# Altium PCB Test Board TFT.PcbDoc
Units mm, origin at the board's own origin, x right, y up, seen from the top; angles counter-clockwise.
Board outline 146.15 x 87.23 mm, 2 copper layers (Top Layer, Bottom Layer); 5 components, 44 nets, 132 pads, 0 vias.
Unrouted connection lines stored in the file: 43.
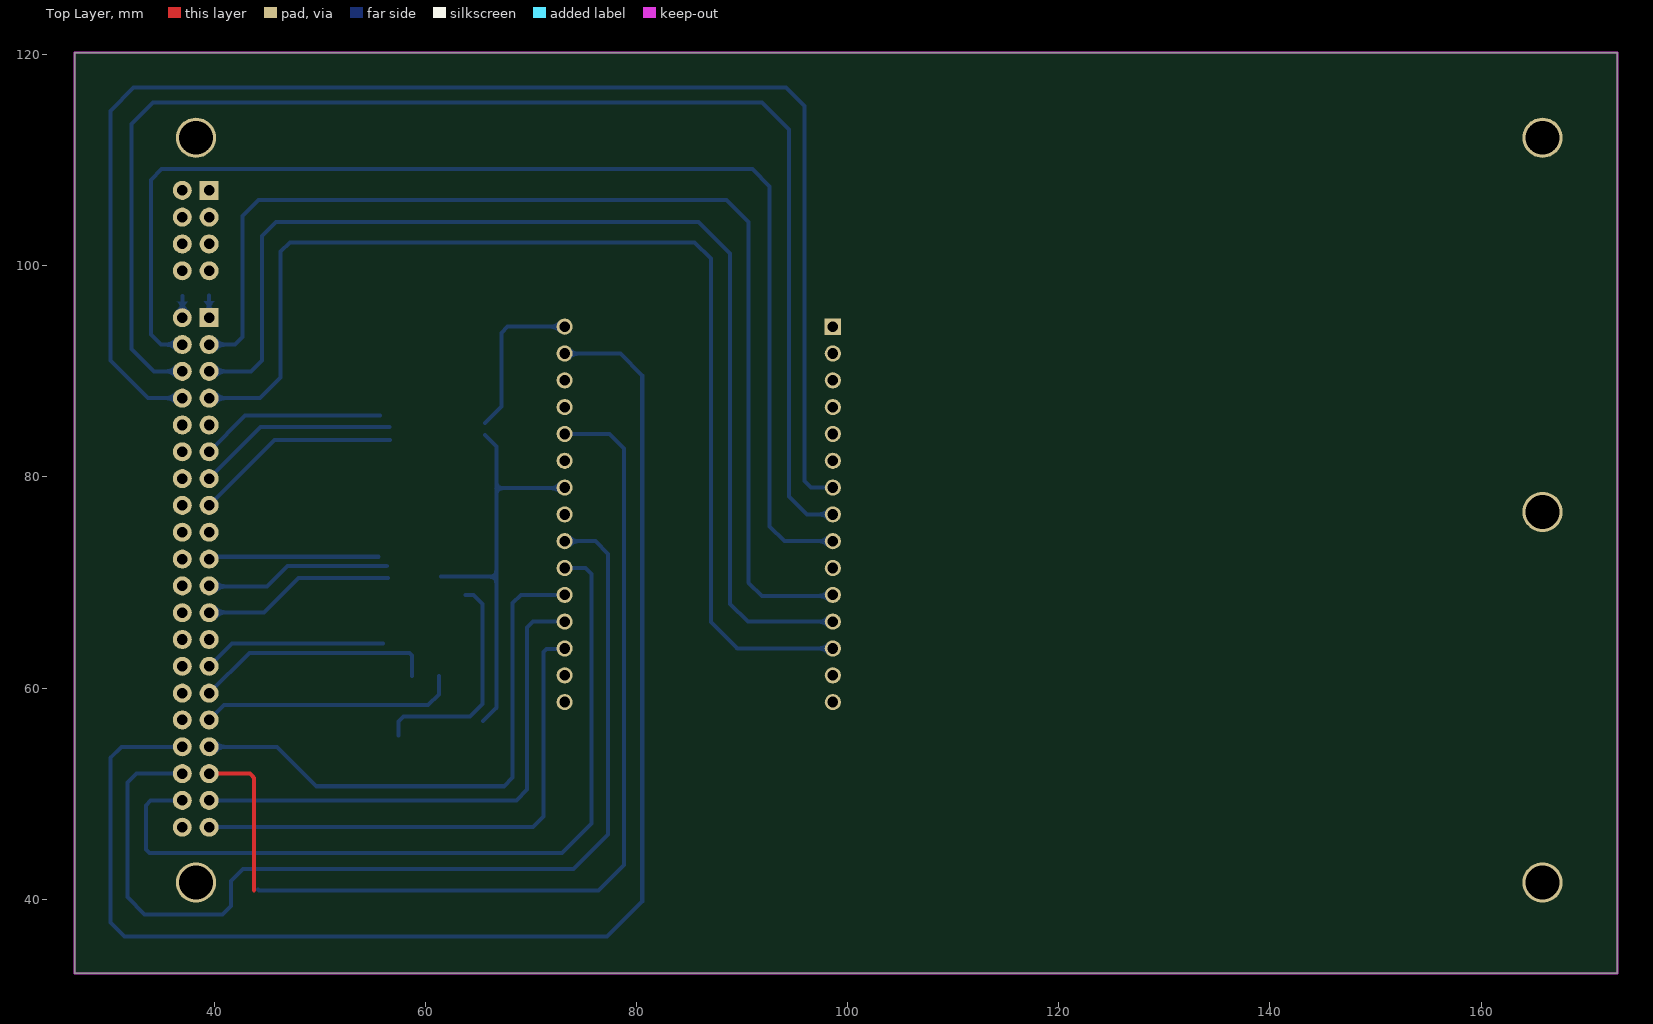
[diagram p0: Top Layer view]
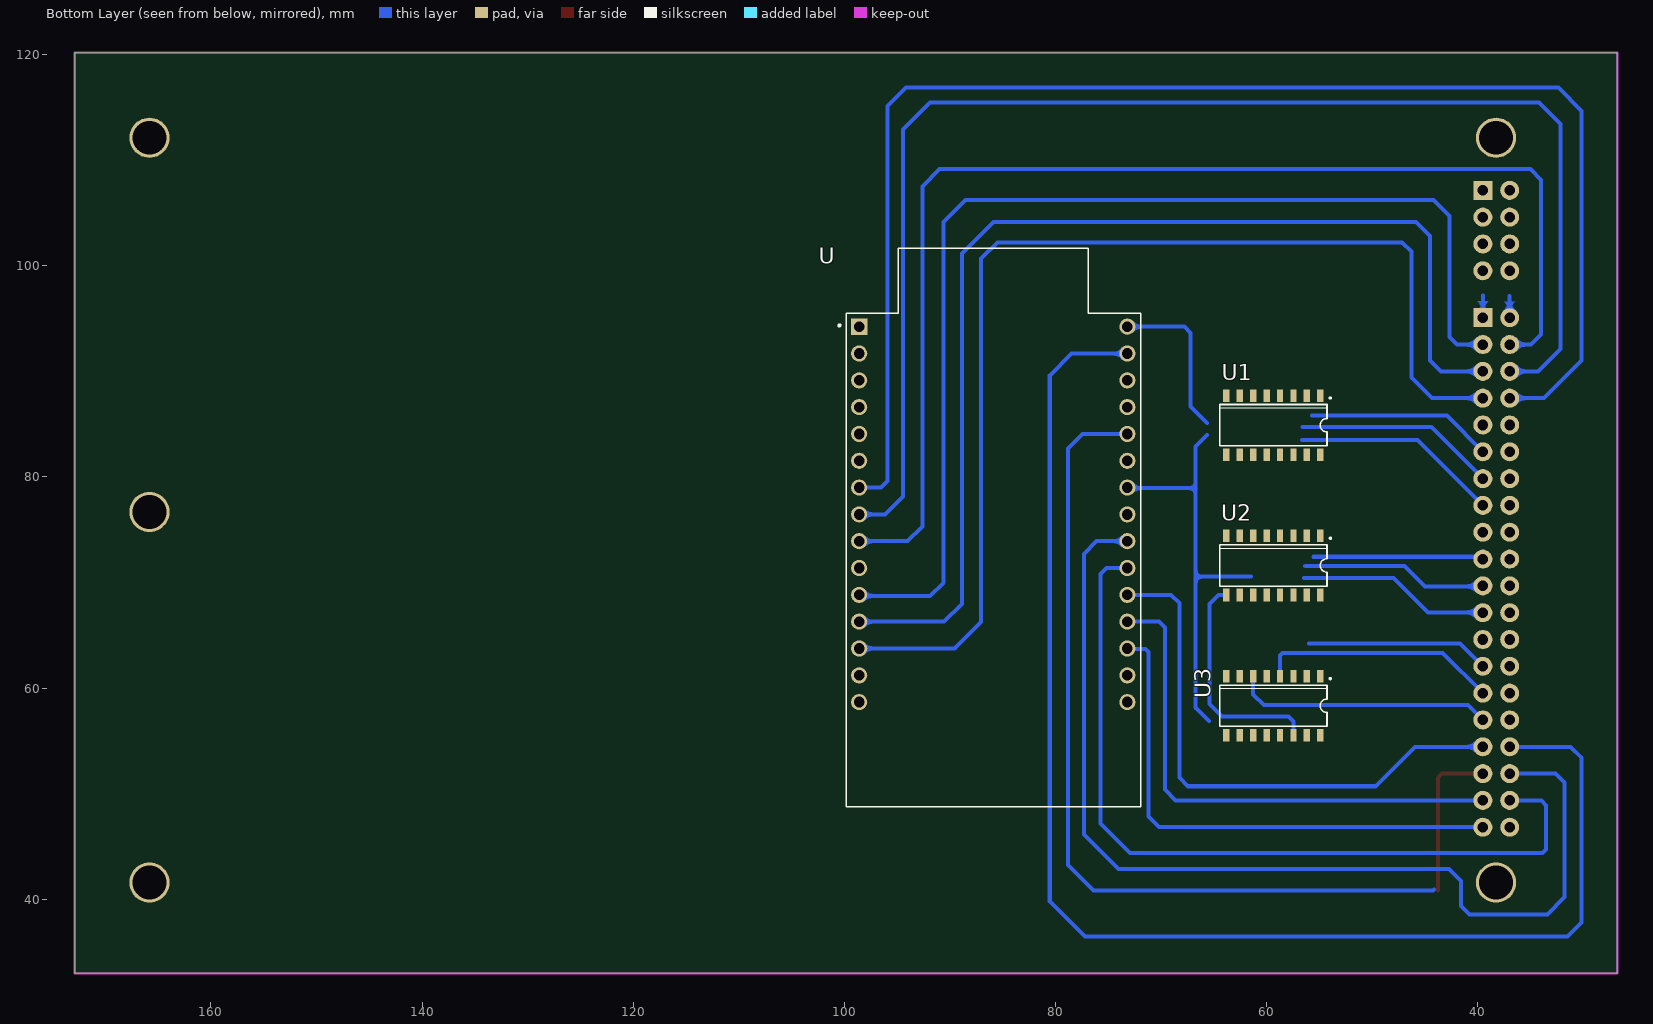
[diagram p1: Bottom Layer view, seen from below]

## Layer stack, top to bottom
Top Solder: solder mask 0.0102, Solder Resist, Dk 3.5
Top Layer: signal copper 0.0356
Dielectric 1: dielectric 0.32, FR-4, Dk 4.8
Bottom Layer: signal copper 0.0356
Bottom Solder: solder mask 0.0102, Solder Resist, Dk 3.5

## Board outline
26.775,32.975 26.775,120.2 168.375,120.2 172.925,120.2 172.925,32.975

## Design rules (kind name [scope] priority, off if disabled: settings)
Clearance [All] p1: gap=0.508 ignorepadtopadclearanceinfootprint=FALSE
PlaneConnect [All] p1: planeconnectstyle=Direct reliefexpansion=0.508 reliefentries=4 reliefconductorwidth=0.254 reliefairgap=0.254
PolygonConnect [All] p1: connectstyle=Direct reliefconductorwidth=0.254 reliefentries=4 polygonreliefangle="90 Angle" airgapwidth=0.254
RoutingVias [All] p1: holewidth=1.2 width=1.8 viastyle="Through Hole" minholewidth=1.2 minwidth=1.8 maxholewidth=1.2 maxwidth=1.8
SolderMaskExpansion [All] p1: expansion=0.102 istentingtop=FALSE
Width [All] p1: maxlimit=0.762 minlimit=0.381 preferedwidth=0.508
29 further rules are at their usual default settings.

## Components (designator, comment, footprint, x,y, rotation, side; value= is the part's Value field where it differs from the comment)
U "ESP32-DEVKITC" MODULE_ESP32-DEVKITC 85.9,71.38 r180 bottom
U1 "LOGIC-74HC595N(DIP16)" SO16 59.375,84.9 r0 bottom
U2 "LOGIC-74HC595N(DIP16)" SO16 59.375,71.612 r0 bottom
U3 "LOGIC-74HC595N(DIP16)" SO16 59.375,58.325 r0 bottom
? "TFT" "Female Header 20x2" 39.525,95.08 r180 top

## Footprints (in the part's own frame and the unit in brackets; to place one, negate y for a bottom-side part, rotate by r counter-clockwise, add the part's x,y. Pads: shape width x height; smd on the part's side, far side on the other; paste and mask are expansions set on the pad)
"Female Header 20x2" [mm]
  rect 1.8x1.8 hole 1: 1(0,0) 1-1(0,-12.065)
  round 1.8 hole 1: 1-2(2.54,-12.065) 1-3(0,-9.525) 1-4(2.54,-9.525) 1-5(0,-6.985) 1-6(2.54,-6.985) 1-7(0,-4.445) 1-8(2.54,-4.445) 2(2.54,0) 2(2.54,0) 3(0,2.54) 4(2.54,2.54) 5(0,5.08) 6(2.54,5.08) 7(0,7.62) 8(2.54,7.62) 9(0,10.16) 10(2.54,10.16) 11(0,12.7) 12(2.54,12.7) 13(0,15.24) 14(2.54,15.24) 15(0,17.78) 16(2.54,17.78) 17(0,20.32) 18(2.54,20.32) 19(0,22.86) 20(2.54,22.86) 21(0,25.4) 22(2.54,25.4) 23(0,27.94) 24(2.54,27.94) 25(0,30.48) 26(2.54,30.48) 27(0,33.02) 28(2.54,33.02) 29(0,35.56) 30(2.54,35.56) 31(0,38.1) 32(2.54,38.1) 33(0,40.64) 34(2.54,40.64) 35(0,43.18) 36(2.54,43.18) 37(0,45.72) 38(2.54,45.72) 39(0,48.26) 40(2.54,48.26)
  round 3.8 hole 3.2: ""(-126.3,-17.05) ""(-126.3,18.4) ""(-126.3,53.5) ""(1.25,53.5) ""(1.25,-17.05)
  body extent -128.89,-19.67 3.81,56.13, height 15.26
MODULE_ESP32-DEVKITC [mm]
  rect 1.53x1.53 hole 1.02: 1(-12.7,22.85)
  round 1.53 hole 1.02: 2(-12.7,20.31) 3(-12.7,17.77) 4(-12.7,15.23) 5(-12.7,12.69) 6(-12.7,10.15) 7(-12.7,7.61) 8(-12.7,5.07) 9(-12.7,2.53) 10(-12.7,-0.01) 11(-12.7,-2.55) 12(-12.7,-5.09) 13(-12.7,-7.63) 14(-12.7,-10.17) 15(-12.7,-12.71) 16(12.7,-12.71) 17(12.7,-10.17) 18(12.7,-7.63) 19(12.7,-5.09) 20(12.7,-2.55) 21(12.7,-0.01) 22(12.7,2.53) 23(12.7,5.07) 24(12.7,7.61) 25(12.7,10.15) 26(12.7,12.69) 27(12.7,15.23) 28(12.7,17.77) 29(12.7,20.31) 30(12.7,22.85)
  silkscreen extent -14.67,-22.61 13.95,30.3, body extent -14.22,-22.61 14.28,28.32, height 13.03
SO16 [mm]
  rect 0.6x1.2 smd: 1(-4.445,-2.8) 2(-3.175,-2.8) 3(-1.905,-2.8) 4(-0.635,-2.8) 5(0.635,-2.8) 6(1.905,-2.8) 7(3.175,-2.8) 8(4.445,-2.8) 9(4.445,2.8) 10(3.175,2.8) 11(1.905,2.8) 12(0.635,2.8) 13(-0.635,2.8) 14(-1.905,2.8) 15(-3.175,2.8) 16(-4.445,2.8)
  silkscreen extent -5.44,-2.61 5.08,1.96, body extent -4.95,-2.92 4.95,3.08, height 1.75

## Part data
U: "- Transceiver; 802.11 b/g/n _Wi-Fi, WiFi, WLAN_, BluetoothÂ® Smart Ready 4.x Dual Mode For Use With ESP-WROOM-32", Package=None, Availability=Unavailable, MF="Espressif Systems", MP=ESP32-DEVKITC-32D-F, Price=None, SnapEDA_Link=https://www.snapeda.com/parts/ESP32-DEVKITC-32D-F/Espressif%20Systems/view-part/4220172/?ref=snap
U1 U2 U3: "Shift Shift Register 1 Element 8 Bit 16-PDIP", Package="SOT38-4-16 Nexperia", Availability="In Stock", Check_prices=https://www.snapeda.com/parts/74HC595N/Texas+Instruments/view-part/?ref=eda, MF="Texas Instruments", MP=74HC595N, Price=None, Purchase-URL=https://pricing.snapeda.com/search/part/74HC595N/?ref=eda, SnapEDA_Link=https://www.snapeda.com/parts/74HC595N/Texas+Instruments/view-part/?ref=snap

## Nets (pads, with @x,y where several pads share a name; then routed paths per layer and width w, separated by ;. In a path a pad name is that pad's centre, name@x,y a point inside that pad or via, vN(x,y) a via of type N, cw(c..) or ccw(c..) an arc to the next point about the centre after c; other vN are vias at no path point)
+5: ?.2 U1.10 U1.16 U2.10 U2.16 U3.10 U3.16 U.15 | length 2.1
  Bottom Layer w0.381: ?.2@36.985,95.08 36.993,95.088 36.993,97.143 37,97.15
GND: ?.1 ?.40 U1.8 U1.13 U2.8 U2.13 U3.8 U3.13 U.14 | length 2.1
  Bottom Layer w0.381: ?.40@36.963,46.798 ?.40 ; ?.1 39.525,97.175
LATCH: U1.12 U2.12 U3.12 U.25
LCD_BL: ?.39 U.18 | length 49.8
  Bottom Layer w0.381: ?.39 70.195,46.82 71.2,47.825 71.2,63.425 71.498,63.723 73.173,63.723 U.18
LCD_BUSY: ?.37 U.19 | length 49.7
  Bottom Layer w0.381: ?.37 68.635,49.36 69.65,50.375 69.65,65.725 70.215,66.29 U.19
LCD_CLK/SCL: ?.34 U.29 | length 133.2
  Bottom Layer w0.381: ?.34 31.24,54.44 30.2,53.4 30.2,37.775 31.525,36.45 77.225,36.45 80.55,39.775 80.55,89.625 78.5,91.675 73.215,91.675 U.29
LCD_CS: ?.3 U.11 | length 107.1
  Bottom Layer w0.381: ?.3 41.99,92.54 42.7,93.25 42.7,104.725 44.225,106.25 88.525,106.25 90.625,104.15 90.625,69.975 91.875,68.725 98.495,68.725 U.11
LCD_DC: ?.4 U.9 | length 116.5
  Bottom Layer w0.381: ?.4 34.96,92.54 34,93.5 34,108.125 35.025,109.15 90.977,109.15 92.6,107.527 92.6,75.325 94.015,73.91 U.9
LCD_DIN/SDA: ?.35 U.26 | length 96.4
  Top Layer w0.381: ?.35 43.377,51.9 43.675,51.602 43.675,51.575 43.775,51.475 43.775,40.85
  Bottom Layer w0.381: 44.15,40.925 44.25,40.825 76.425,40.825 78.825,43.225 78.825,82.675 77.43,84.07 U.26
LCD_DOUT: ?.36 U.22 | length 98.4
  Bottom Layer w0.381: ?.36 32.625,51.9 31.775,51.05 31.775,40.2 33.425,38.55 40.775,38.55 41.6,39.375 41.6,41.725 42.725,42.85 74.05,42.85 77.325,46.125 77.325,72.7 76.115,73.91 U.22
LCD_PEN: ?.38 U.21 | length 77.7
  Bottom Layer w0.381: ?.38 33.99,49.36 33.525,48.895 33.525,44.725 33.875,44.375 72.94,44.375 75.725,47.16 75.725,70.825 75.18,71.37 U.21
LCD_RD: ?.5 U.12 | length 107
  Bottom Layer w0.381: ?.5 43.5,90 44.525,91.025 44.525,102.8 45.875,104.15 85.9,104.15 88.875,101.175 88.875,67.975 90.56,66.29 U.12
LCD_RESET: ?.7 U.13 | length 108.3
  Bottom Layer w0.381: ?.7 44.36,87.46 46.3,89.4 46.3,101.35 47.175,102.225 85.5,102.225 87.05,100.675 87.05,66.25 89.55,63.75 U.13
LCD_RPTCS: ?.33 U.20 | length 52.4
  Bottom Layer w0.381: ?.33 45.935,54.44 49.675,50.7 67.45,50.7 68.275,51.525 68.275,68.05 69.055,68.83 U.20
LCD_TE: ?.8 U.7 | length 137.8
  Bottom Layer w0.381: ?.8 33.735,87.46 30.175,91.02 30.175,114.675 32.375,116.875 94.15,116.875 95.9,115.125 95.9,79.63 96.54,78.99 U.7
LCD_WR: ?.6 U.8 | length 130.8
  Bottom Layer w0.381: ?.6 34.3,90 32.175,92.125 32.175,113.425 34.225,115.475 91.9,115.475 94.45,112.925 94.45,78.15 96.15,76.45 U.8
Net_9: ?.9 U1.15
Net_10: ?.10 U1.1
Net_11: ?.11 U1.2 | length 17.6
  Bottom Layer w0.381: ?.11 42.945,85.8 55.725,85.8
Net_12: ?.12 U1.3
Net_13: ?.13 U1.4 | length 19.1
  Bottom Layer w0.381: ?.13 44.41,84.725 56.625,84.725
Net_14: ?.14 U1.5
Net_15: ?.15 U1.6 | length 19.7
  Bottom Layer w0.381: ?.15 45.725,83.5 56.675,83.5
Net_16: ?.16 U1.7
Net_17: ?.17 U2.15
Net_18: ?.18 U2.1
Net_19: ?.19 U2.2 | length 16.7
  Bottom Layer w0.381: ?.19@38.92,72.4 38.959,72.439 55.589,72.439
Net_20: ?.20 U2.3
Net_21: ?.21 U2.4 | length 18
  Bottom Layer w0.381: ?.21@39.184,69.625 45.025,69.625 46.95,71.55 56.35,71.55
Net_22: ?.22 U2.5
Net_23: ?.23 U2.6 | length 18.3
  Bottom Layer w0.381: ?.23@39.492,67.175 44.725,67.175 47.975,70.425 56.475,70.425
Net_24: ?.24 U2.7
Net_25: ?.25 U3.15
Net_26: ?.26 U3.1
Net_27: ?.27 U3.2 | length 17.3
  Bottom Layer w0.381: ?.27 41.679,64.214 55.977,64.214
Net_28: ?.28 U3.3
Net_29: ?.29 U3.4 | length 22.9
  Bottom Layer w0.381: ?.29 43.33,63.325 58.517,63.325 58.74,63.102 U3.4
Net_30: ?.30 U3.5
Net_31: ?.31 U3.6 | length 24.5
  Bottom Layer w0.381: ?.31 40.92,58.375 60.277,58.375 61.28,59.378 U3.6
Net_32: ?.32 U3.7
NetU1_9: U1.9 U2.14
NetU2_9: U2.9 U3.14 | length 21.4
  Bottom Layer w0.381: U3.14 57.47,56.845 57.925,57.3 64.25,57.3 65.425,58.475 65.425,67.95 64.562,68.812 U2.9
SPI_MOSI: U1.14 U.30 | length 15.7
  Bottom Layer w0.381: 65.675,85.1 67.225,86.65 67.225,93.65 67.805,94.23 U.30@73.456,94.23
SPI_SCLK: U1.11 U2.11 U3.11 U.24 | length 40
  Bottom Layer w0.381: 61.503,70.55 66.737,70.55 ; 65.475,56.875 66.737,58.137 66.737,70.55 ; 65.675,83.95 66.737,82.888 66.737,78.935 ; U.24@73.49,78.935 66.737,78.935 ; 66.737,70.55 66.737,78.935
pads on no net: ?. ?.1-1 ?.1-2 ?.1-3 ?.1-4 ?.1-5 ?.1-6 ?.1-7 ?.1-8 U3.9 U.1 U.2 U.3 U.4 U.5 U.6 U.10 U.16 U.17 U.23 U.27 U.28

## Polygon pours and split planes (outlines as drawn)
GND on Bottom Layer "NONET_L02_P000" (solid, remove dead copper, shelved, pour order 0): 26.775,32.975 26.775,120.2 168.375,120.2 172.925,120.2 172.925,32.975

## Keep-outs
Keep-Out Layer:
  the board outline again, w0.2